# Altium PCB pcb.PcbDoc
Units mm, origin at the board's own origin, x right, y up, seen from the top; angles counter-clockwise.
Board outline 34.75 x 19.5 mm, 2 copper layers (Top Layer, Bottom Layer); 7 components, 9 nets, 46 pads, 6 vias.
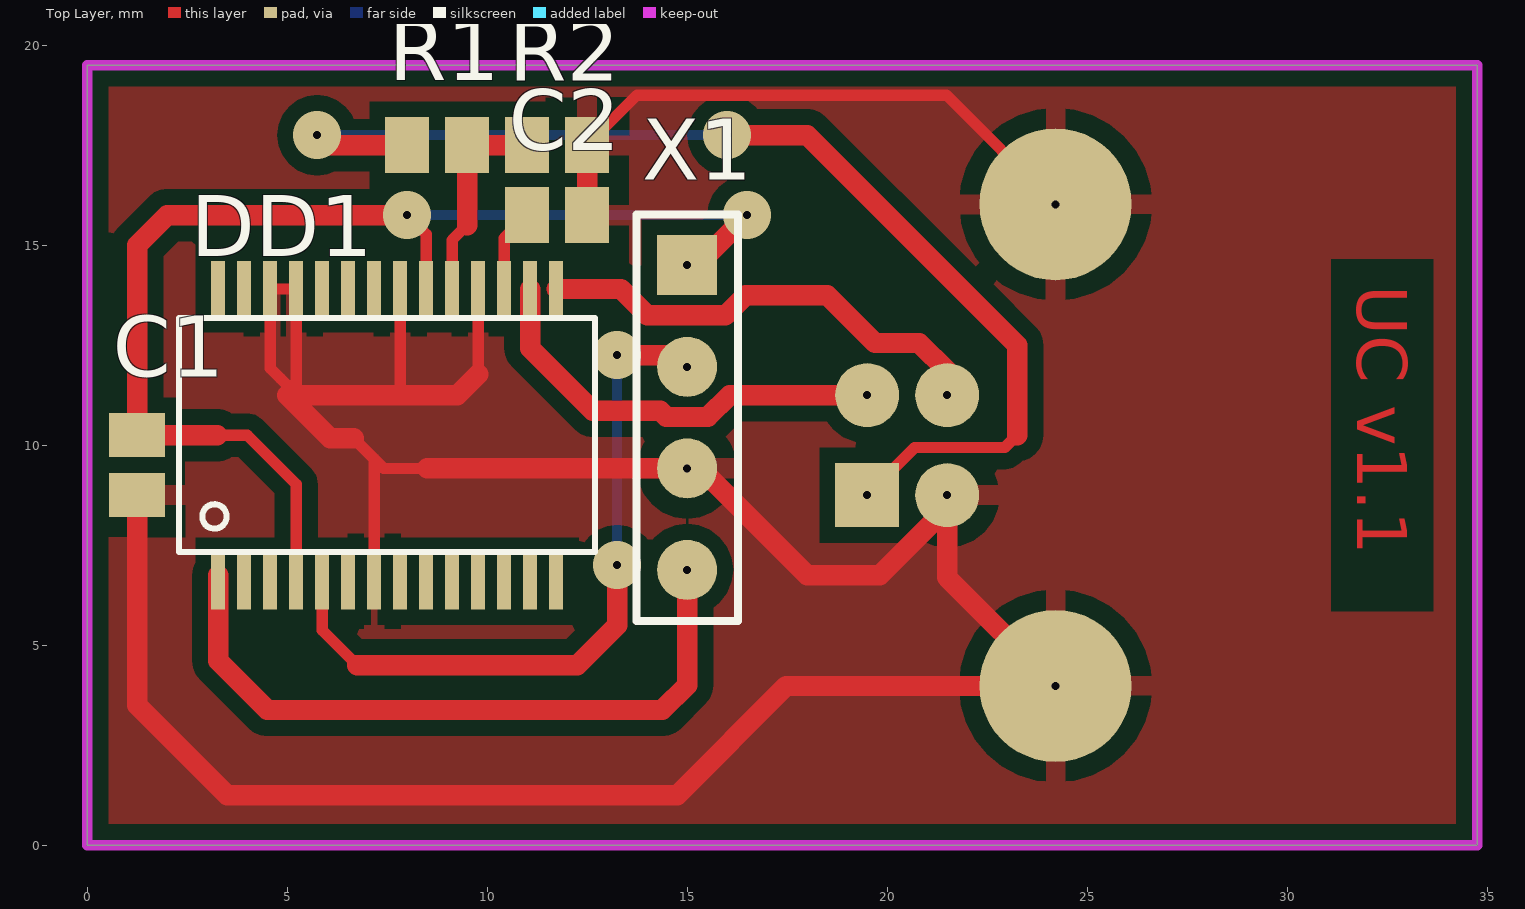
[diagram p0: Top Layer view]
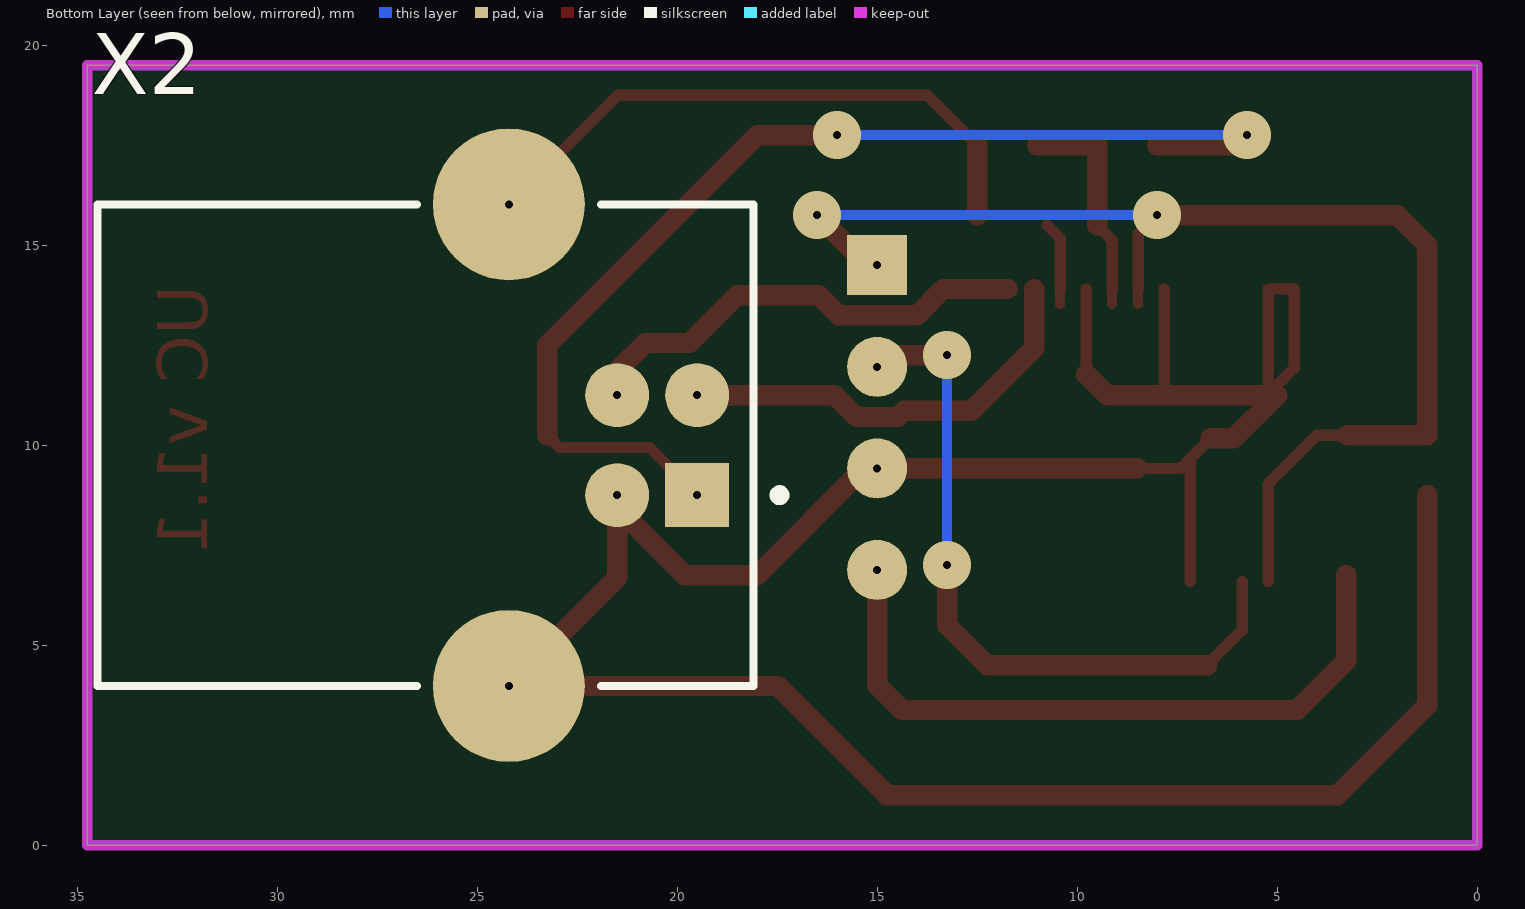
[diagram p1: Bottom Layer view, seen from below]

## Layer stack, top to bottom
Top Solder: solder mask 0.0102, Solder Resist, Dk 3.5
Top Layer: signal copper 0.0356
Dielectric 1: dielectric 0.32, FR-4, Dk 4.8
Bottom Layer: signal copper 0.0356
Bottom Solder: solder mask 0.0102, Solder Resist, Dk 3.5

## Board outline
0,0 0,19.5 34.75,19.5 34.75,0

## Design rules (kind name [scope] priority, off if disabled: settings)
Clearance Clearance_Poly_Mounting [InPolygon vs (IsPad AND InNet('No Net'))] p1: gap=5
Clearance Clearance_Poly_PWR [InPolygon vs InNetClass('PWR')] p2: gap=2
Clearance Clearance_Poly [InPolygon] p3: gap=0.4
Clearance Clearance_Vias [All vs IsVia] p4: gap=0.25
Clearance Clearance_PAD [All vs (IsPad AND OnLayer('Multi-Layer'))] p5: gap=0.25
Clearance Clearance_1 [All] p6: gap=0.15
PlaneClearance [All] p1: clearance=0.5
PolygonConnect PolygonConnect_1 [All vs IsNamedPolygon('Top Layer-No Net')] p1: connectstyle=Relief reliefconductorwidth=0.5 reliefentries=4 polygonreliefangle="90 Angle" airgapwidth=0.5
PolygonConnect [All] p2: connectstyle=Direct reliefconductorwidth=0.254 reliefentries=4 polygonreliefangle="90 Angle" airgapwidth=0.254
RoutingVias [All] p1: holewidth=0.6 width=1.2 viastyle="Through Hole" minholewidth=0.6 minwidth=1.2 maxholewidth=0.6 maxwidth=1.2
SilkToSolderMaskClearance SilkscreenOverComponentPads [IsPad] p1: minsilkscreentomaskgap=0.254 clearancetoexposedcopper=TRUE
SolderMaskExpansion [All] p1: expansion=0.102
Width Width_PWR [InNetClass('PWR')] p1: maxlimit=2 minlimit=1 preferedwidth=1.5
Width [All] p2: maxlimit=1 minlimit=0.28 preferedwidth=0.508 minimp=50.000000 maximp=50.000000 favimp=50.000000
28 further rules are at their usual default settings.

## Components (designator, comment, footprint, x,y, rotation, side; value= is the part's Value field where it differs from the comment)
C1 "C_2" C0805 1.25,9.5 r270 top
C2 "C_2" C0805 11.75,15.75 r0 top
DD1 "FT232RL" SSOP28-LD 7.5,10.25 r0 top
R1 "R_1" C0805 8.75,17.5 r0 top
R2 "R_1" C0805 11.75,17.5 r0 top
X1 "PLS4" HDR1X4 15,14.5 r270 top
X2 "USB Type B" "USB Type B" 20.5,10 r0 bottom

## Footprints (in the part's own frame and the unit in brackets; to place one, negate y for a bottom-side part, rotate by r counter-clockwise, add the part's x,y. Pads: shape width x height; smd on the part's side, far side on the other; paste and mask are expansions set on the pad)
C0805 [mm] "Chip Capacitor, Body 2.0x1.3mm, IPC High Density"
  rect 1.1x1.4 smd: 1(-0.75,0) 2(0.75,0)
  body extent -1,-0.65 1,0.66, height 0.73
HDR1X4 [mm] "Connector; Header; 4 Position"
  rect 1.5x1.5 hole 0.2: 1(0,0)
  round 1.5 hole 0.2: 2(2.54,0) 3(5.08,0) 4(7.62,0)
  silkscreen extent -1.27,-1.27 8.89,1.27, body extent -1.27,-1.27 8.89,1.27, height 8.44
SSOP28-LD [mm] "FT232RL"
  rect 0.348x1.397 smd: 1(-4.225,-3.656) 2(-3.575,-3.656) 3(-2.925,-3.656) 4(-2.275,-3.656) 5(-1.625,-3.656) 6(-0.975,-3.656) 7(-0.325,-3.656) 8(0.325,-3.656) 9(0.975,-3.656) 10(1.625,-3.656) 11(2.275,-3.656) 12(2.925,-3.656) 13(3.575,-3.656) 14(4.225,-3.656) 15(4.225,3.656) 16(3.575,3.656) 17(2.925,3.656) 18(2.275,3.656) 19(1.625,3.656) 20(0.975,3.656) 21(0.325,3.656) 22(-0.325,3.656) 23(-0.975,3.656) 24(-1.625,3.656) 25(-2.275,3.656) 26(-2.925,3.656) 27(-3.575,3.656) 28(-4.225,3.656)
  silkscreen extent -5.2,-2.93 5.2,2.93
"USB Type B" [mm] "Connector; USB1.1, Type B, Thru-Hole; 4 Position; Right Angle"
  rect 1.6x1.6 hole 0.2: 1(-1,1.25)
  round 1.6 hole 0.2: 2(-1,-1.25) 3(1,-1.25) 4(1,1.25)
  round 3.8 hole 0.2: 5(3.71,6.02) 6(3.71,-6.02)
  silkscreen extent -3.18,-6.02 13.99,6.02, body extent -2.55,-7.4 13.95,7.4, height 11

## Via types
v1: diameter 1.2, hole 0.2, Top Layer to Bottom Layer, 6 vias

## Nets (pads, with @x,y where several pads share a name; then routed paths per layer and width w, separated by ;. In a path a pad name is that pad's centre, name@x,y a point inside that pad or via, vN(x,y) a via of type N, cw(c..) or ccw(c..) an arc to the next point about the centre after c; other vN are vias at no path point)
+5V: C1.1 DD1.4 DD1.20 X1.1 | length 31.7
  Top Layer w0.25: DD1.20@8.475,13.525 DD1.20
  Top Layer w0.28: 3.25,10.25 4,10.25 5.225,9.025 DD1.4 ; v1(8,15.75) 8.475,15.275 DD1.20
  Top Layer w0.508: 3.25,10.25 C1.1 1.25,15 2,15.75 v1(8,15.75) ; X1.1 15.25,14.5 v1(16.5,15.75)
  Bottom Layer w0.25: v1(8,15.75) v1(16.5,15.75)
GND: C1.2 C2.2 DD1.7 DD1.18 DD1.21 DD1.25 DD1.26 R2.2 X1.3 X2.4 X2.5 X2.6 | length 89.4
  Top Layer w0.28: 5.25,11.25 5.225,11.275 ; 6.665,10.17 7.175,9.66 ; DD1.7 7.175,9.66 ; 7.75,11.25 7.825,11.325 DD1.21 ; 8.5,9.42 7.415,9.42 7.175,9.66 ; 9.775,11.775 DD1.18 ; R2.2 13.75,18.75 21.48,18.75 X2.6 ; 5.225,11.275 DD1.25 DD1.26 4.575,11.925 4.825,11.675 5.125,11.375 5.225,11.275
  Top Layer w0.508: C1.2 1.25,3.5 3.5,1.25 14.75,1.25 17.48,3.98 X2.5 21.5,6.69 X2.4@21.5,8.437 ; 5.125,11.375 5,11.25 6.08,10.17 6.665,10.17 ; 5.25,11.25 7.75,11.25 9.25,11.25 9.775,11.775 ; 8.5,9.42 X1.3 15.33,9.42 18,6.75 19.813,6.75 X2.4@21.5,8.437 ; C2.2 R2.2 ; X2.4 X2.4@21.5,8.437
NetC2_1: C2.1 DD1.17 | length 2.1
  Top Layer w0.25: DD1.17@10.425,13.525 DD1.17
  Top Layer w0.28: DD1.17 10.425,15.175 C2.1@10.75,15.5
NetDD1_1: DD1.1 X1.4 | length 17.5
  Top Layer w0.508: DD1.1@3.275,6.75 3.275,4.605 4.5,3.38 14.38,3.38 15,4 X1.4
NetDD1_5: DD1.5 X1.2 | length 18
  Top Layer w0.28: DD1.5 5.875,5.375 6.75,4.5
  Top Layer w0.508: 6.75,4.5 12.25,4.5 13.25,5.5 v1(13.25,7) ; v1(13.25,12.25) 14.71,12.25 X1.2
  Bottom Layer w0.25: v1(13.25,7) v1(13.25,12.25)
NetDD1_19: DD1.19 R1.2 R2.1 | length 5.6
  Top Layer w0.25: DD1.19@9.125,13.525 DD1.19
  Top Layer w0.28: DD1.19 9.125,15.125 9.5,15.5
  Top Layer w0.508: 9.5,15.5 R1.2 R2.1
USB_+5V: R1.1 X2.1 | length 28.6
  Top Layer w0.28: X2.1 20.69,9.94 22.94,9.94 23.25,10.25
  Top Layer w0.508: v1(5.75,17.75) 6,17.5 R1.1 ; v1(16,17.75) 18,17.75 23.25,12.5 23.25,10.25
  Bottom Layer w0.25: v1(5.75,17.75) v1(16,17.75)
USB_DM: DD1.16 X2.2 | length 10.8
  Top Layer w0.508: DD1.16 11.075,12.425 12.64,10.86 14.327,10.86 14.481,10.706 15.519,10.706 16.063,11.25 X2.2
USB_DP: DD1.15 X2.3 | length 11.6
  Top Layer w0.508: DD1.15@11.733,13.906 13.344,13.906 14.004,13.246 15.959,13.246 16.463,13.75 18.5,13.75 19.696,12.554 20.804,12.554 21.5,11.858 X2.3
pads on no net: DD1.2 DD1.3 DD1.6 DD1.8 DD1.9 DD1.10 DD1.11 DD1.12 DD1.13 DD1.14 DD1.22 DD1.23 DD1.24 DD1.27 DD1.28

## Polygon pours and split planes (outlines as drawn)
GND on Top Layer "Top Layer-No Net" (solid, remove dead copper, pour order 0): 0,0 0,19.5 34.75,19.5 34.75,0

## Keep-outs
Keep-Out Layer:
  the board outline again, w0.254

## Other copper
Top Layer:
  text "UC v1.1" at 31.75,14 h1.25 r270